# Altium PCB BMS_main.PcbDoc
Units mm, origin at the board's own origin, x right, y up, seen from the top; angles counter-clockwise.
Board outline 93 x 63 mm, 2 copper layers (Top Layer, Bottom Layer), stack 2.071 mm thick; 128 components, 116 nets, 463 pads, 112 vias.
Unrouted connection lines stored in the file: 30.
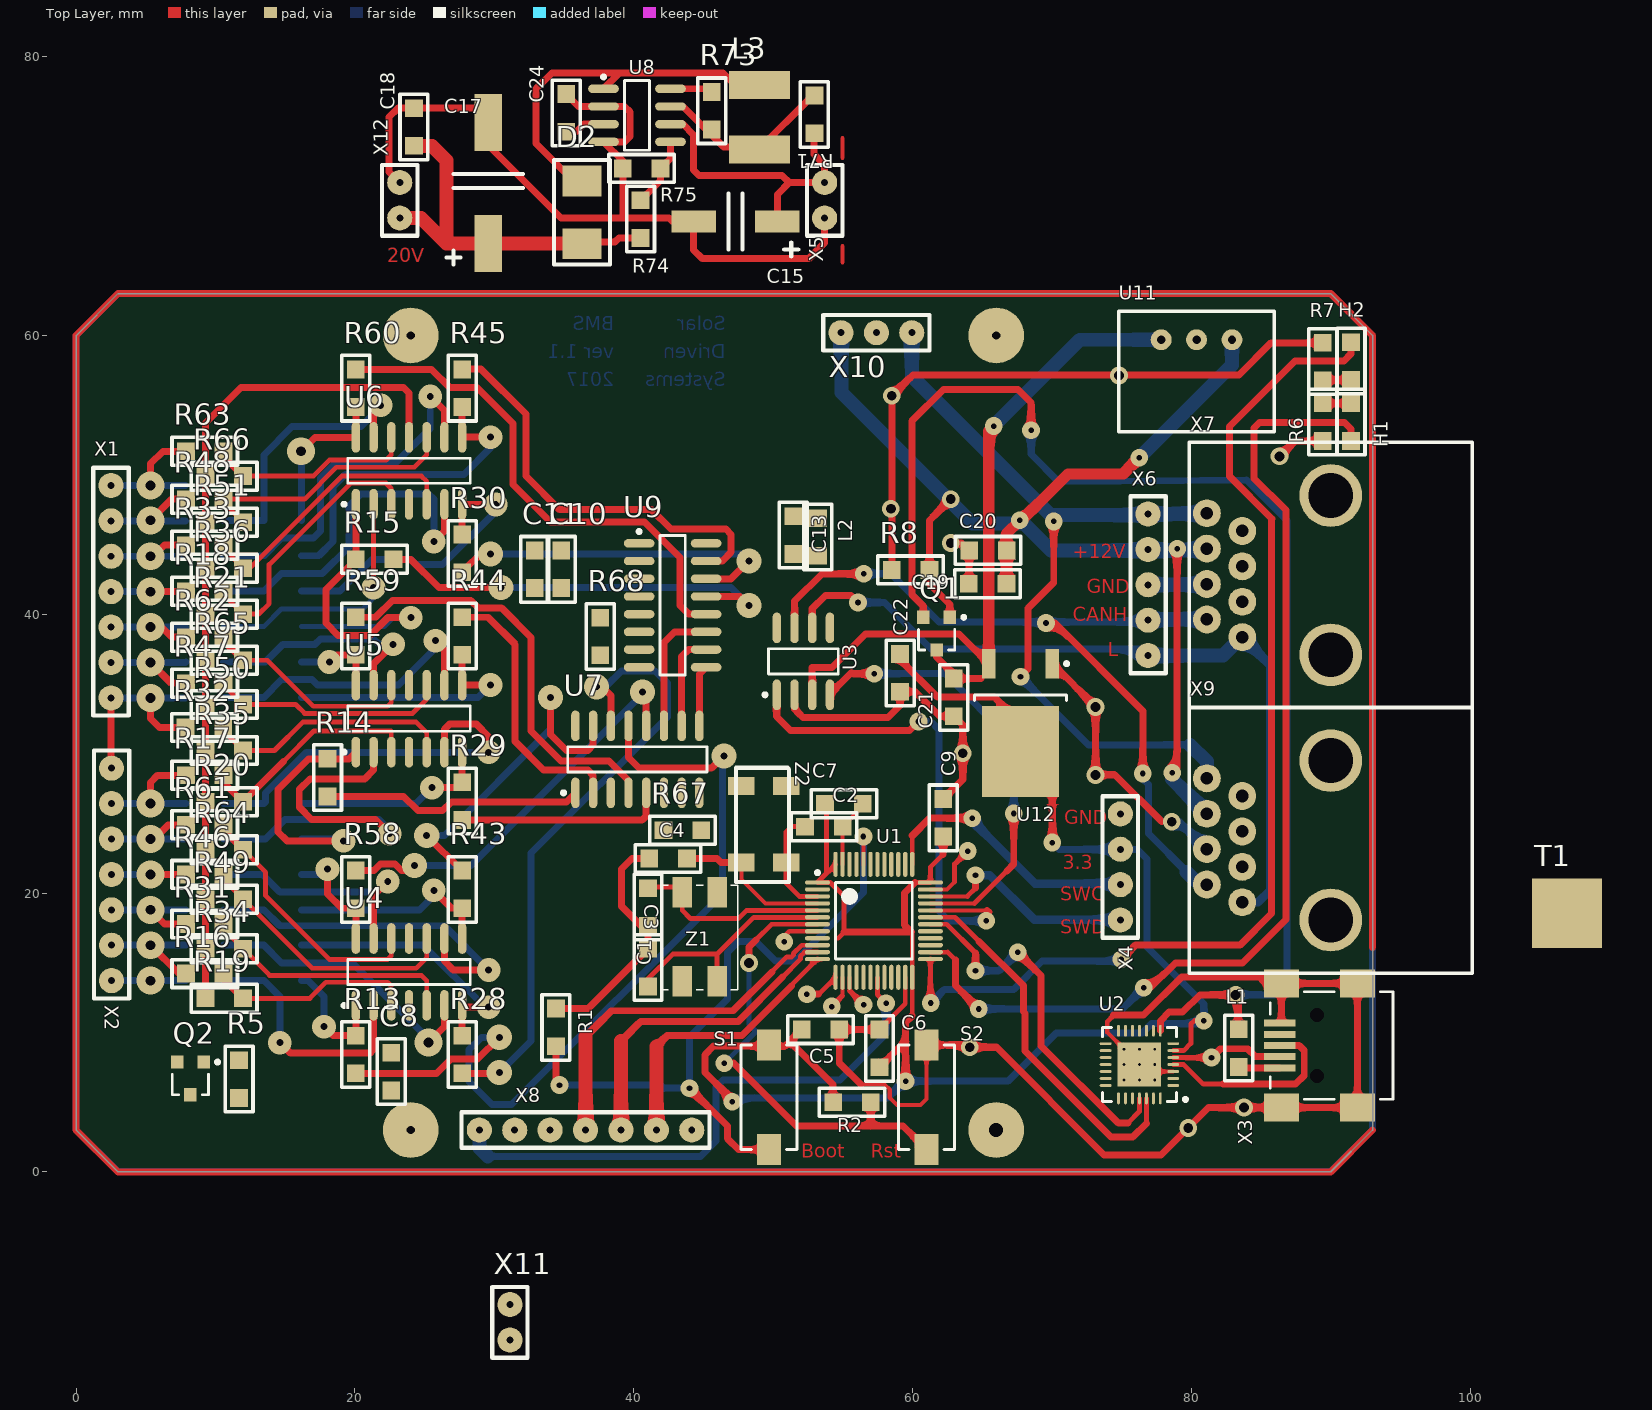
[diagram p0: Top Layer view]
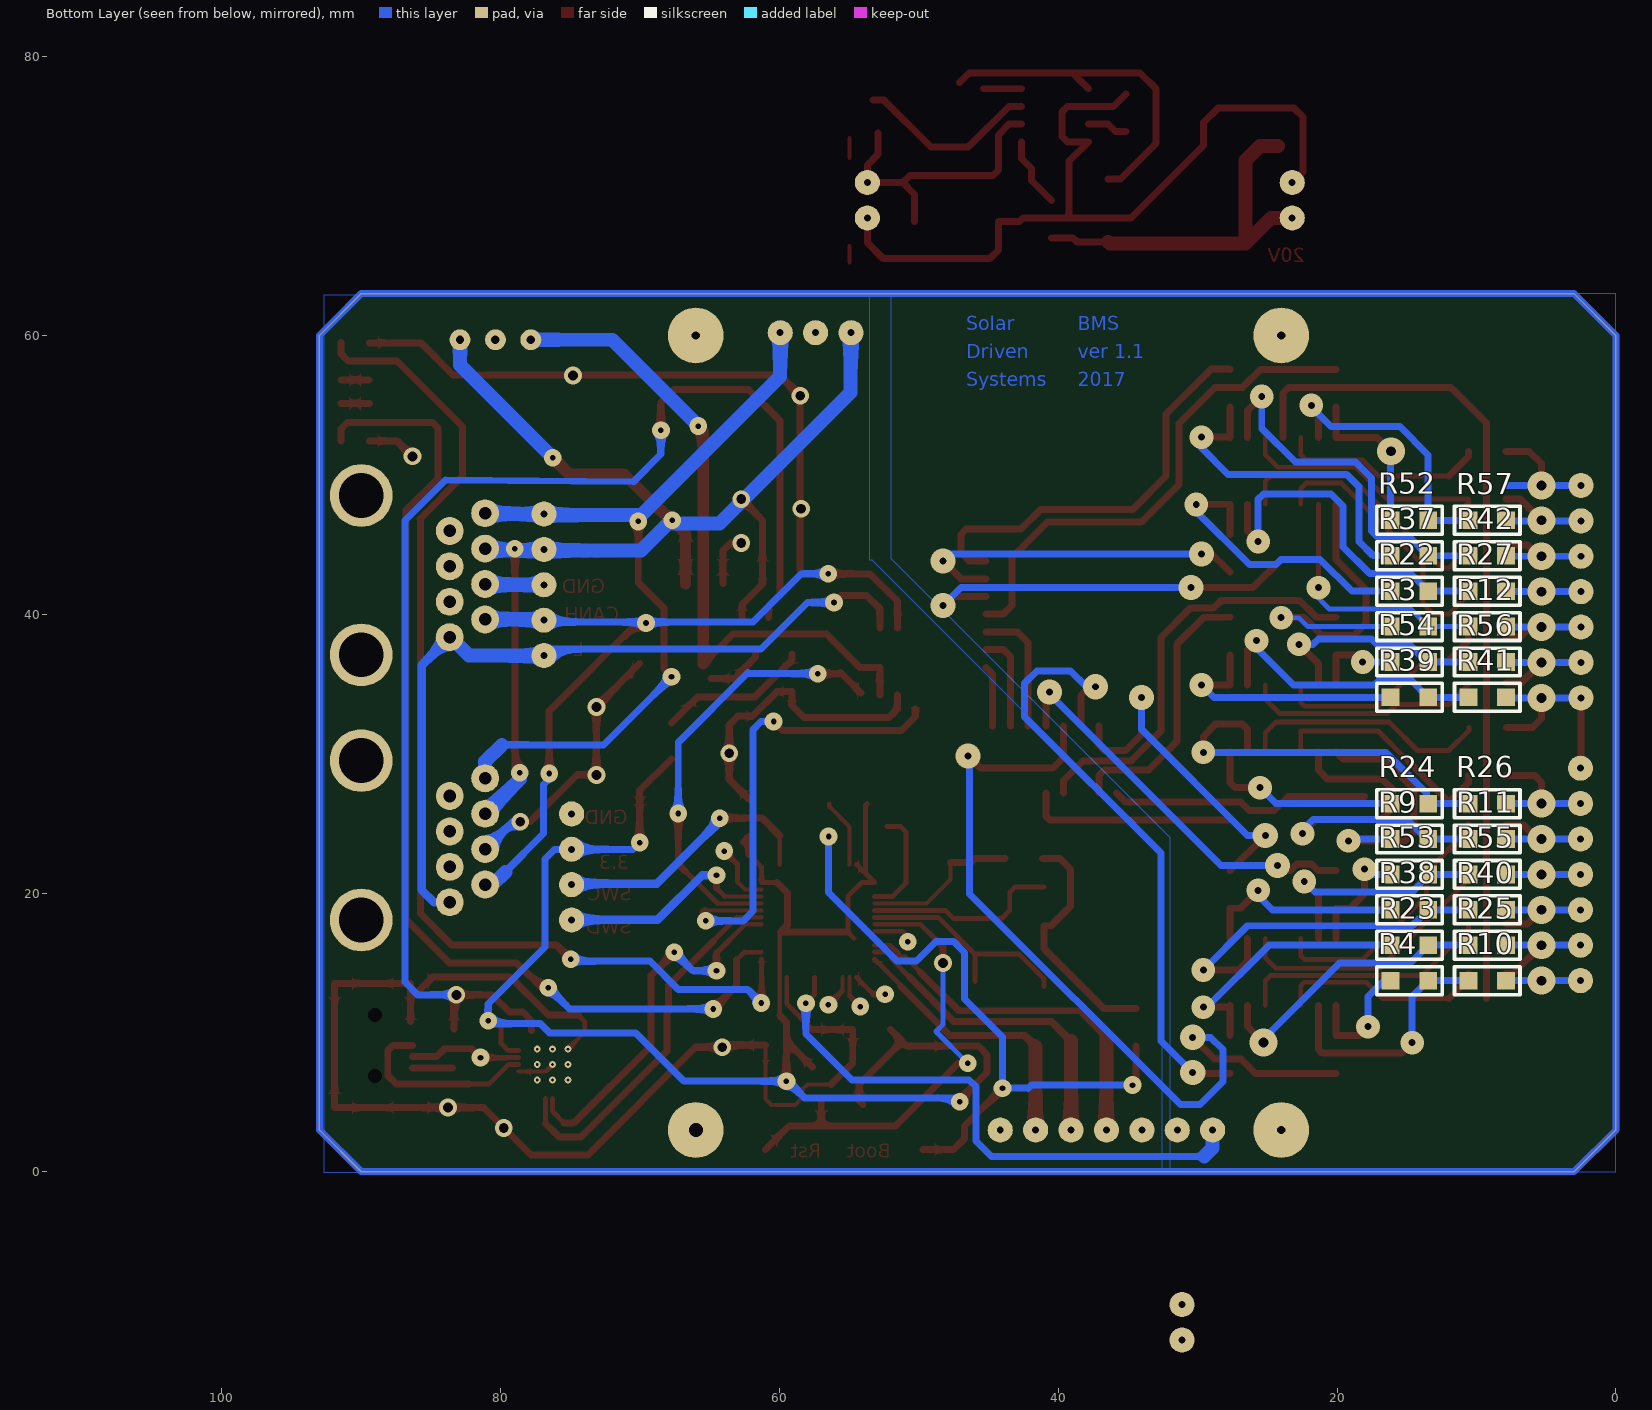
[diagram p1: Bottom Layer view, seen from below]

## Layer stack, top to bottom
Top Solder: solder mask 0.0102, Solder Resist, Dk 3.5
Top Layer: signal copper 0.0356
Dielectric 1: dielectric 2, FR-4, Dk 4.8
Bottom Layer: signal copper 0.0356
Bottom Solder: solder mask 0.0102, Solder Resist, Dk 3.5

## Board outline
0,3 0,60 3,63 90,63 93,60 93,3 90,0 3,0

## Design rules (kind name [scope] priority, off if disabled: settings)
Clearance Power-_poly [InNet('-_CELL_1') vs InPoly] p1: gap=0.5
Clearance Power+_poly [InNet('+_CELL_12') vs InPoly] p2: gap=0.5
Clearance Poly-all [All vs InPoly] p3: gap=0.4
Clearance Clearance_1 [All] p4: gap=0.15
PolygonConnect PolygonConnect_to_tie [All vs HasFootprint('Poly_tie_5x5')] p1: connectstyle=Direct reliefconductorwidth=0.5 reliefentries=4 polygonreliefangle="90 Angle" airgapwidth=0.35
PolygonConnect PolygonConnect_1 [All] p2: connectstyle=Relief reliefconductorwidth=0.4 reliefentries=4 polygonreliefangle="90 Angle" airgapwidth=0.4
RoutingVias [All] p1: holewidth=0.711 width=1.27 viastyle="Through Hole" minholewidth=0.711 minwidth=1.27 maxholewidth=0.711 maxwidth=1.27
ShortCircuit [InNet('GND') vs InNet('GNDA')] p1: allowed=TRUE
SolderMaskExpansion [All] p1: expansion=0.102
Width [All] p1: maxlimit=2 minlimit=0.254 preferedwidth=0.35
29 further rules are at their usual default settings.

## Components (designator, comment, footprint, x,y, rotation, side; value= is the part's Value field where it differs from the comment)
C1 "22pF" C0805 41.021,17.653 r90 top
C2 "10pF" C0805 54.991,24.765 r180 top
C3 "22pF" C0805 41.021,16.002 r270 top
C4 "10pF" C0805 41.115,22.479 r0 top
C5 "100nF" C0805 54.74,10.207 r180 top
C6 "100nF" C0805 57.628,10.207 r270 top
C7 "100nF" C0805 56.421,26.416 r180 top
C8 "100nF" C0805 22.606,8.542 r270 top
C9 "100nF" C0805 62.2,26.75 r270 top
C10 "100nF" C0805 34.798,41.877 r90 top
C11 "100nF" C0805 32.893,41.877 r90 top
C13 "100nF" C0805 51.435,44.323 r90 top
C15 "100uF" CAP_EL_SMD_6.3mm 50.296,68.172 r180 top
C17 "470uF" Cap_El_SMD_10mm 29.564,66.584 r90 top
C18 "0.1uF" C0805 24.23,76.3 r270 top
C19 "100nF" C0805 64.033,42.185 r0 top
C20 "100nF" C0805 64.059,44.577 r0 top
C21 "100nF" C0805 62.962,32.686 r90 top
C22 "100nF" C0805 59.106,34.442 r90 top
C24 "722pF" C0805 35.152,77.316 r270 top
D2 "S2M" SMB_DIODE 36.286,71.084 r270 top
H1 "LED_SMD" C0805 91.456,52.432 r90 top
H2 "LED_SMD" C0805 91.456,59.507 r270 top
L1 "Inductance" L0805 83.399,7.528 r90 top
L2 "BLM" L0805 53.213,44.196 r90 top
L3 "470uH" L1812 49.022,73.078 r90 top
Q1 "IRLML6401" sot-23 61.722,38.608 r180 top
Q2 "IRLML6401" sot-23 8.189,6.699 r180 top
R1 "Resistor" R0805 34.417,11.717 r270 top
R2 "Resistor" R0805 54.3,5 r0 top
R3 "249K" R0805 13.462,39.116 r0 bottom
R4 "249K" R0805 13.462,13.716 r0 bottom
R5 "10K" R0805 11.684,5.301 r90 top
R6 "Resistor" R0805 89.424,55.132 r270 top
R7 "Resistor" R0805 89.424,59.474 r270 top
R8 "10K" R0805 58.514,43.18 r0 top
R9 "249K" R0805 13.462,23.876 r0 bottom
R10 "499K" R0805 7.874,13.716 r0 bottom
R11 "499K" R0805 7.874,23.876 r0 bottom
R12 "499K" R0805 7.874,39.116 r0 bottom
R13 "10K" R0805 20.066,9.766 r270 top
R14 "10K" R0805 18.034,29.624 r270 top
R15 "10K" R0805 20.066,43.942 r0 top
R16 "499K" R0805 7.874,14.224 r0 top
R17 "499K" R0805 7.874,28.448 r0 top
R18 "499K" R0805 7.874,41.656 r0 top
R19 "249K" R0805 9.271,12.446 r0 top
R20 "249K" R0805 9.271,26.543 r0 top
R21 "249K" R0805 9.271,40.005 r0 top
R22 "249K" R0805 13.462,41.656 r0 bottom
R23 "249K" R0805 13.462,16.256 r0 bottom
R24 "249K" R0805 13.462,26.416 r0 bottom
R25 "499K" R0805 7.874,16.256 r0 bottom
R26 "499K" R0805 7.874,26.416 r0 bottom
R27 "499K" R0805 7.874,41.656 r0 bottom
R28 "10K" R0805 27.686,9.766 r270 top
R29 "10K" R0805 27.686,27.94 r270 top
R30 "10K" R0805 27.686,45.72 r270 top
R31 "499K" R0805 7.874,17.78 r0 top
R32 "499K" R0805 7.841,31.877 r0 top
R33 "499K" R0805 7.874,44.958 r0 top
R34 "249K" R0805 9.271,16.002 r0 top
R35 "249K" R0805 9.271,30.226 r0 top
R36 "249K" R0805 9.271,43.307 r0 top
R37 "249K" R0805 13.462,44.196 r0 bottom
R38 "249K" R0805 13.462,18.796 r0 bottom
R39 "249K" R0805 13.462,34.036 r0 bottom
R40 "499K" R0805 7.874,18.796 r0 bottom
R41 "499K" R0805 7.874,34.036 r0 bottom
R42 "499K" R0805 7.874,44.196 r0 bottom
R43 "10K" R0805 27.686,18.91 r90 top
R44 "10K" R0805 27.686,37.084 r90 top
R45 "10K" R0805 27.686,54.864 r90 top
R46 "499K" R0805 7.874,21.336 r0 top
R47 "499K" R0805 7.874,35.052 r0 top
R48 "499K" R0805 7.874,48.26 r0 top
R49 "249K" R0805 9.271,19.558 r0 top
R50 "249K" R0805 9.271,33.528 r0 top
R51 "249K" R0805 9.271,46.593 r0 top
R52 "249K" R0805 13.462,46.736 r0 bottom
R53 "249K" R0805 13.462,21.336 r0 bottom
R54 "249K" R0805 13.462,36.576 r0 bottom
R55 "499K" R0805 7.874,21.336 r0 bottom
R56 "499K" R0805 7.874,36.576 r0 bottom
R57 "499K" R0805 7.874,46.736 r0 bottom
R58 "10K" R0805 20.066,18.91 r90 top
R59 "10K" R0805 20.066,37.084 r90 top
R60 "10K" R0805 20.066,54.864 r90 top
R61 "499K" R0805 7.874,24.892 r0 top
R62 "499K" R0805 7.874,38.354 r0 top
R63 "499K" R0805 7.874,51.689 r0 top
R64 "249K" R0805 9.271,23.114 r0 top
R65 "249K" R0805 9.271,36.703 r0 top
R66 "249K" R0805 9.271,49.911 r0 top
R67 "10K" R0805 42.131,24.511 r0 top
R68 "10K" R0805 37.592,39.751 r270 top
R71 "1.5" R0805 52.959,74.516 r90 top
R73 "180" R0805 45.593,77.47 r270 top
R74 "15K" R0805 40.486,69.696 r270 top
R75 "1K" R0805 39.216,71.982 r0 top
S1 "Tact_switch" Tact_switch_smd 49.7,9.1 r270 top
S2 "Tact_switch" Tact_switch_smd 61,9.1 r270 top
T1 "Poly_tie" Poly_tie_5x5 105.95,18.542 r0 top
U1 "STM32F103C8T6" LQFP48_N 57.226,18.009 r0 top
U2 "CP2102-GM" SLAB-QFN-28-3125x3125TP_N 76.275,7.696 r180 top
U3 "MCP2551-I/SN" SOIC-SN8_N 52.167,36.623 r90 top
U4 "LM324AD" SO14_N 23.876,14.338 r90 top
U5 "LM324AD" SO14_N 23.876,32.512 r90 top
U6 "LM324AD" SO14_N 23.876,50.292 r90 top
U7 "M74HC4051M1R" SO16_N 40.259,29.591 r90 top
U8 "MC33063AD" 751-05_N 40.232,75.792 r0 top
U9 "M74HC4051M1R" SO16_N 42.786,40.64 r0 top
U11 "DC/DC 5v" "DC/DC R-78E" 82.915,59.693 r180 top
U12 "LD1117ADT12TR" TO-252_N 67.745,32.204 r270 top
X1 "PINS 7x2.54" "PINS 7X2.54" 2.5,49.24 r270 top
X2 "PINS 7x2.54" "PINS 7X2.54" 2.54,28.956 r270 top
X3 "miniUSB" miniUSB 92.107,9.064 r90 top
X4 "Pins 4x2.54" "Pins 4x2.54" 74.905,18.059 r90 top
X5 "Pins 2x2.54" "Pins 2x2.54" 53.694,68.426 r90 top
X6 "Pins 5x2.54" "Pins 5x2.54" 76.897,37.033 r90 top
X7 "RJ45" RJ45 83.653,38.357 r90 top
X8 "PINS 7x2.54" "PINS 7X2.54" 28.92,3 r0 top
X9 "RJ45" RJ45 83.65,19.34 r90 top
X10 "Pins 3x2.54" "Pins 3x2.54" 54.864,60.198 r0 top
X11 "Pins 2x2.54" "Pins 2x2.54" 31.115,-12.065 r90 top
X12 "Pins 2x2.54" "Pins 2x2.54" 23.214,70.966 r270 top
Z1 "12 MHz" "kx 13 12MHz" 45.974,20.066 r270 top
Z2 "32.768kHz" "Geyer KX - 327S 32.768kHz" 50.927,22.186 r90 top

## Footprints (in the part's own frame and the unit in brackets; to place one, negate y for a bottom-side part, rotate by r counter-clockwise, add the part's x,y. Pads: shape width x height; smd on the part's side, far side on the other; paste and mask are expansions set on the pad)
751-05_N [mm] "SOIC, 8-Leads, Body 4.9x3.9mm, Pitch 1.27mm, IPC Medium Density"
  oval 2.2x0.6 smd: 1(-2.4,1.905) 2(-2.4,0.635) 3(-2.4,-0.635) 4(-2.4,-1.905) 5(2.4,-1.905) 6(2.4,-0.635) 7(2.4,0.635) 8(2.4,1.905)
  silkscreen extent -2.52,-2.5 0.9,2.88, body extent -1.95,-2.45 1.95,2.45, height 1.75
C0805 [mm]
  rect 1.27x1.27 smd: 1(0,0) 2(2.7,0)
  silkscreen extent -1,-1 3.7,1, body extent 0.32,-0.66 2.42,0.64, height 0.51
CAP_EL_SMD_6.3mm [mm]
  rect 3.2x1.6 smd: 1(0,0) 2(6,0)
  silkscreen extent -1.5,-2 3.5,2.5, body extent -0.65,-3.3 6.65,3.3, height 5.9
Cap_El_SMD_10mm [mm]
  rect 4.1x2 smd: 1(0,0) 2(8.7,0)
  silkscreen extent -1.5,-2.5 5,3, body extent -0.55,-4.25 9.15,4.25, height 10.3
"DC/DC R-78E" [mm]
  round 1.5 hole 0.6: 1(0,0) 2(2.54,0) 3(5.08,0)
  silkscreen extent -3.05,-2.03 8.13,6.6, body extent -3.16,-2.13 8.34,5.42, height 3.18
"Geyer KX - 327S 32.768kHz" [mm]
  rect 1.3x1.9 smd: 1(0,0) 2(0,3.2) 3(5.5,3.2) 4(5.5,0)
  silkscreen extent -1.4,-0.2 6.8,3.6, body extent -1.6,-0.25 7.1,3.55, height 2.51
"kx 13 12MHz" [mm]
  rect 2.2x1.4 smd: 1(0,-2.5) 2(6.4,-2.5) 3(6.4,0) 4(0,0)
  silkscreen extent -0.5,-4 7,1.5, body extent -0.27,-3.77 6.73,1.23
L0805 [mm]
  rect 1.27x1.27 smd: 1(0,0) 2(2.7,0)
  silkscreen extent -1,-1 3.7,1, body extent 0.32,-0.6 2.32,0.6
L1812 [mm]
  rect 2x4.4 smd: 1(0.25,0) 2(4.9,0)
  body extent 0.25,-1.6 4.75,1.6, height 3.2
LQFP48_N [mm] "Thin QFP, 48-Leads, Body 7x7mm, Pitch 0.5mm, IPC Medium Density"
  oval 1.8x0.3 smd: 1(-4.05,2.75) 2(-4.05,2.25) 3(-4.05,1.75) 4(-4.05,1.25) 5(-4.05,0.75) 6(-4.05,0.25) 7(-4.05,-0.25) 8(-4.05,-0.75) 9(-4.05,-1.25) 10(-4.05,-1.75) 11(-4.05,-2.25) 12(-4.05,-2.75) 25(4.05,-2.75) 26(4.05,-2.25) 27(4.05,-1.75) 28(4.05,-1.25) 29(4.05,-0.75) 30(4.05,-0.25) 31(4.05,0.25) 32(4.05,0.75) 33(4.05,1.25) 34(4.05,1.75) 35(4.05,2.25) 36(4.05,2.75)
  oval 0.3x1.8 smd: 13(-2.75,-4.05) 14(-2.25,-4.05) 15(-1.75,-4.05) 16(-1.25,-4.05) 17(-0.75,-4.05) 18(-0.25,-4.05) 19(0.25,-4.05) 20(0.75,-4.05) 21(1.25,-4.05) 22(1.75,-4.05) 23(2.25,-4.05) 24(2.75,-4.05) 37(2.75,4.05) 38(2.25,4.05) 39(1.75,4.05) 40(1.25,4.05) 41(0.75,4.05) 42(0.25,4.05) 43(-0.25,4.05) 44(-0.75,4.05) 45(-1.25,4.05) 46(-1.75,4.05) 47(-2.25,4.05) 48(-2.75,4.05)
  silkscreen extent -4.17,-2.75 2.75,3.57, body extent -3.5,-3.5 3.5,3.5, height 1.6
miniUSB [mm]
  rect 0.5x2.25 smd: 1(-1.6,5.775) 2(-0.8,5.775) 3(0,5.775) 4(0.8,5.775) 5(1.6,5.775)
  rect 2x2.5 smd: 6(-4.45,5.65) 7(4.45,5.65) 8(-4.45,0.2) 9(4.45,0.2)
  rect 0x0 hole 1 unplated: ""(-2.2,3.1) ""(2.2,3.1)
  silkscreen extent -3.85,-2.35 3.85,6.45, body extent -5,-2.45 5,6.45, height 3.95
"Pins 2x2.54" [mm]
  round 1.8 hole 0.5: 1(0,0) 2(2.54,0)
  silkscreen extent -1.27,-1.27 3.81,1.27, body extent -1.27,-1.27 3.81,1.27, height 8.81
"Pins 3x2.54" [mm]
  round 1.8 hole 0.5: 1(0,0) 2(2.54,0) 3(5.08,0)
  silkscreen extent -1.27,-1.27 6.35,1.27, body extent -1.27,-1.27 6.35,1.27, height 8.81
"Pins 4x2.54" [mm]
  round 1.8 hole 0.5: 1(0,0) 2(2.54,0) 3(5.08,0) 4(7.62,0)
  silkscreen extent -1.27,-1.27 8.89,1.27, body extent -1.27,-1.27 8.89,1.27, height 8.81
"Pins 5x2.54" [mm]
  round 1.8 hole 0.5: 1(0,0) 2(2.54,0) 3(5.08,0) 4(7.62,0) 5(10.16,0)
  silkscreen extent -1.27,-1.27 11.43,1.27, body extent -1.27,-1.27 11.43,1.27, height 8.81
"PINS 7X2.54" [mm]
  round 1.8 hole 0.5: 1(0,0) 2(2.54,0) 3(5.08,0) 4(7.62,0) 5(10.16,0) 6(12.7,0) 7(15.24,0)
  silkscreen extent -1.27,-1.27 16.51,1.27, body extent -1.27,-1.27 16.51,1.27, height 8.54
Poly_tie_5x5 [mm]
  rect 3x5 smd: 1(0,0) 2(2,0)
R0805 [mm]
  rect 1.27x1.27 smd: 1(0,0) 2(2.7,0)
  silkscreen extent -1,-1 3.7,1, body extent 0.35,-0.62 2.35,0.63, height 0.61
RJ45 [mm]
  round 2 hole 0.9: 1(0,0) 2(1.27,2.54) 3(2.54,0) 4(3.81,2.54) 5(5.08,0) 6(6.35,2.54) 7(7.62,0) 8(8.89,2.54)
  round 4.5 hole 3.21: 9(-1.27,-6.35) 10(10.16,-6.35)
  silkscreen extent -5.08,-16.51 13.97,3.81, body extent -3.18,-14.48 12.06,3.81, height 12.7
SLAB-QFN-28-3125x3125TP_N [mm] "QFN, 28-Leads, Body 5x5mm, Pitch 0.5mm, Thermal Pad 3.13x3.13mm, IPC Medium Density"
  oval 0.85x0.2 smd: 1(-2.425,1.5) 2(-2.425,1) 3(-2.425,0.5) 4(-2.425,0) 5(-2.425,-0.5) 6(-2.425,-1) 7(-2.425,-1.5) 15(2.425,-1.5) 16(2.425,-1) 17(2.425,-0.5) 18(2.425,0) 19(2.425,0.5) 20(2.425,1) 21(2.425,1.5)
  oval 0.2x0.85 smd: 8(-1.5,-2.425) 9(-1,-2.425) 10(-0.5,-2.425) 11(0,-2.425) 12(0.5,-2.425) 13(1,-2.425) 14(1.5,-2.425) 22(1.5,2.425) 23(1,2.425) 24(0.5,2.425) 25(0,2.425) 26(-0.5,2.425) 27(-1,2.425) 28(-1.5,2.425)
  rect 3.13x3.13 smd: 29(0,0)
  silkscreen extent -3.42,-2.65 2.65,2.65, body extent -2.5,-2.5 2.5,2.5, height 1
SMB_DIODE [mm]
  rect 2.2x2.8 smd: 1(0,0) 2(4.5,0)
  silkscreen extent -1.5,-2 6,2, body extent -0.55,-1.95 4.95,1.95, height 2.45
SO14_N [mm] "SOIC, 14-Leads, Body 8.7x3.9mm, Pitch 1.27mm, IPC Medium Density"
  oval 2.2x0.6 smd: 1(-2.4,3.81) 2(-2.4,2.54) 3(-2.4,1.27) 4(-2.4,0) 5(-2.4,-1.27) 6(-2.4,-2.54) 7(-2.4,-3.81) 8(2.4,-3.81) 9(2.4,-2.54) 10(2.4,-1.27) 11(2.4,0) 12(2.4,1.27) 13(2.4,2.54) 14(2.4,3.81)
  silkscreen extent -2.52,-4.4 0.9,4.78, body extent -1.95,-4.33 1.95,4.33, height 1.75
SO16_N [mm] "SOIC, 16-Leads, Body 9.9x3.9mm, Pitch 1.27mm, IPC Medium Density"
  oval 2.2x0.6 smd: 1(-2.4,4.445) 2(-2.4,3.175) 3(-2.4,1.905) 4(-2.4,0.635) 5(-2.4,-0.635) 6(-2.4,-1.905) 7(-2.4,-3.175) 8(-2.4,-4.445) 9(2.4,-4.445) 10(2.4,-3.175) 11(2.4,-1.905) 12(2.4,-0.635) 13(2.4,0.635) 14(2.4,1.905) 15(2.4,3.175) 16(2.4,4.445)
  silkscreen extent -2.52,-5 0.9,5.42, body extent -1.95,-4.95 1.95,4.95, height 1.75
SOIC-SN8_N [mm] "SOIC, 8-Leads, Body 4.9x3.8mm, Pitch 1.27mm, IPC Medium Density"
  oval 2.2x0.6 smd: 1(-2.4,1.905) 2(-2.4,0.635) 3(-2.4,-0.635) 4(-2.4,-1.905) 5(2.4,-1.905) 6(2.4,-0.635) 7(2.4,0.635) 8(2.4,1.905)
  silkscreen extent -2.52,-2.5 0.9,2.88, body extent -2,-2.5 2,2.5, height 1.75
sot-23 [mm] "SOT-23; 3 Leads; Body 3.1 x 2.5 mm, inc. leads (LxW max)"
  rect 0.9x0.95 smd: 1(-0.95,-1.175) 2(0.95,-1.175) 3(0,1.175)
  silkscreen extent -2.07,-1.3 1.3,1.18
Tact_switch_smd [mm]
  rect 2.2x1.7 smd: 1(0,0) 2(7.5,0)
  silkscreen extent 0,-2 7.5,2, body extent -0.19,-1.8 7.81,1.8, height 2.51
TO-252_N [mm] "D-PAK, 4-Leads, Body 6.1x6.5mm, Pitch 2.28mm, Lead Span 9.7mm, IPC Medium Density"
  rect 2.1x0.95 smd: 1(-4.25,2.28) 3(-4.25,-2.28)
  rect 6.5x5.5 smd: 4(2.05,0)
  silkscreen extent -4.37,-3.3 -1.6,3.43, body extent -2,-3.3 4.2,3.3, height 2.4

## Part data
C1 C2 C3 C4 C5 C6 C7 C8 C9 C10 C11 C13 C18 C19 C20 C21 C22 C24: library part Condensator
C15 C17: library part Cond_polar
D2: library part Diod
L2 L3: library part Inductance
R3 R4 R5 R8 R9 R10 R11 R12 R13 R14 R15 R16 R17 R18 R19 R20 R21 R22 R23 R24 R25 R26 R27 R28 R29 R30 R31 R32 R33 R34 R35 R36 R37 R38 R39 R40 R41 R42 R43 R44 R45 R46 R47 R48 R49 R50 R51 R52 R53 R54 R55 R56 R57 R58 R59 R60 R61 R62 R63 R64 R65 R66 R67 R68 R71 R73 R74 R75: library part Resistor
U1: "STM32 ARM-based 32-bit MCU with 64 Kbytes Flash, 48-pin LQFP, Industrial Temperature"
U2: "Single-Chip USB to UART Bridge, 1024 Bytes EEPROM, -40 to 85 degC, 28-pin QFN, Tube"
U3: "High-Speed CAN Transceiver, 8-Pin SOIC, Industrial Temperature"
U4 U5 U6: "Low-Power Quad Operational Amplifier"
U7 U9: "Analog Multiplexer/Demultiplexer Single 8-Channel"
U8: "DC-to-DC Converter Control Circuit"
U11: library part "DC/DC R-78E"
U12: "1A, Low Drop Positive Voltage Regulator, 1.2V, 3-Pin DPAK, Tape and Reel"
Z1: library part "KX 13 Geyer"
Z2: library part "Crystal Oscillator"

## Free pads (board coordinates)
  round 4 hole 0.6: 1(24,3) 2(24,60) 3(66,60)
  round 4 hole 1: 4(66,3)

## Via types
v1: diameter 1.27, hole 0.4, Top Layer to Bottom Layer, 39 vias
v2: diameter 1.7, hole 0.5, Top Layer to Bottom Layer, 22 vias
v3: diameter 2, hole 0.7, Top Layer to Bottom Layer, 15 vias
v4: diameter 1.8, hole 0.5, Top Layer to Bottom Layer, 12 vias
v5: diameter 1.27, hole 0.7, Top Layer to Bottom Layer, 11 vias
v6: diameter 0.5, hole 0.2, Top Layer to Bottom Layer, 9 vias
v7: diameter 1.27, hole 0.711, Top Layer to Bottom Layer, 4 vias

## Nets (pads, with @x,y where several pads share a name; then routed paths per layer and width w, separated by ;. In a path a pad name is that pad's centre, name@x,y a point inside that pad or via, vN(x,y) a via of type N, cw(c..) or ccw(c..) an arc to the next point about the centre after c; other vN are vias at no path point)
+3.3V: C5.2 C6.2 C7.2 C9.2 C22.2 L2.1 R2.1 R67.2 R68.2 S1.1 U1.1 U1.24 U1.36 U1.48 U2.6 U7.16 U9.16 U12.4 X4.3 | length 136.4
  Top Layer w0.35: C7.2 53.826,26.311 53.826,21.409 ; U1.48 53.826,21.409 ; 54.655,16.759 55.088,17.192 55.088,19.769 54.098,20.759 U1.1 53.826,21.409 ; 59.976,11.2 U1.24 59.976,17.258 ; 60.179,20.759 U1.36 61.276,21.856 62.2,22.78 ; U2.6 79.454,8.696 79.97,9.212 79.97,10.609 80.207,10.846 v1(80.899,10.846)
  Top Layer w0.5: v1(47.055,5.031) 47.208,5.031 45.1,7.139 45.1,8.397 45.72,9.017 50.85,9.017 51.193,9.36 ; C5.2 51.193,9.36 ; R2.1@54,4.834 54.28,5.114 54.28,6.274 51.193,9.36 ; 55.088,17.192 59.91,17.192 59.411,17.692 59.411,19.991 60.179,20.759 ; C6.2 59.5,9.379 ; C22.2 59.106,36.728 61.773,34.061 65.888,34.061 U12.4@67.745,32.204 ; v1(59.5,6.5) 59.5,9.379 ; 59.976,11.2 59.5,10.724 59.5,9.379 ; 62.2,22.78 C9.2 C9.2@62.581,23.669 ; U12.4@67.745,29.629 70.028,27.346 v1(70.028,23.622)
  Bottom Layer w0.5: v1(47.055,5.031) 47.439,5.031 47.247,5.223 47.333,5.309 58.191,5.309 v1@59.441,6.559 ; v1(59.5,6.5) 66.85,6.5 70.307,9.957 76.479,9.957 77.157,10.634 v1@80.571,10.634 ; v1(70.028,23.622) 70.52,23.13 76.133,23.13 76.81,22.454 76.81,16.123 80.899,12.034 v1@80.899,11.256
+5V: C15.1 C21.2 Q1.3 R71.1 U3.3 U8.6 U11.3 U12.3 X5.2 | length 73.8
  Top Layer w0.5: U8.6 43.534,75.157 44.296,74.395 44.296,71.855 44.677,71.474 50.646,71.474 51.154,70.966 ; C15.1 50.296,70.108 51.154,70.966 ; U3.3 52.802,36.173 54.207,36.173 56.624,38.59 63.329,38.59 U12.3 ; R71.1@52.932,74.522 52.932,72.998 53.694,72.236 X5.2 51.154,70.966 ; Q1.3 61.722,36.925 C21.2@62.962,35.685 ; C21.2 64.922,35.386
  Top Layer w0.8: U12.3 65.465,53.146 v1(65.819,53.5)
  Bottom Layer w1: v1(65.819,53.5) 72.012,59.693 U11.3
+5VUSB: L1.2 Q1.2 U2.8 | length 95
  Top Layer w0.5: Q1.2 60.772,40.574 59.944,41.402 59.944,53.848 62.23,56.134 67.564,56.134 68.5,55.198 v1(68.5,53.2) ; U2.8 77.775,10.83 78.407,11.462 79.375,11.462 80.613,12.7 v7(83.181,12.7) 83.348,12.534 L1.2@83.348,10.228
  Bottom Layer w0.5: v1(68.5,53.2) 68.5,51.49 70.484,49.505 83.97,49.63 86.87,46.73 86.87,13.623 85.947,12.7 v7(83.181,12.7)
+12V: C19.2 C20.2 Q1.1 Q2.1 R5.2 R8.2 U11.1 X6.4 X7.6 X9.6 X10.1 | length 92.1
  Top Layer w0.5: Q1.1 62.672,40.706 61.214,42.164 R8.2 61.214,46.736 v7(62.738,48.26) ; v1(67.691,46.736) v1@67.818,46.736 ; v1(78.624,28.629) 78.979,28.984 v1(78.979,44.707)
  Top Layer w0.8: C19.2 66.733,45.778 v1(67.691,46.736) ; v1@67.818,46.736 71.155,50.073 75.113,50.073 v1(76.27,51.23)
  Bottom Layer w0.5: v1(67.691,46.736) 67.767,46.736 v1@68.003,46.5 ; v1@78.624,28.176 v1(78.624,28.629)
  Bottom Layer w1: X10.1@54.9,60.198 54.9,55.9 64.3,46.5 68.003,46.5 69.926,44.577 X7.6@81.113,44.577 ; v1(76.27,51.23) 82.915,57.875 U11.1 ; v1@78.624,28.176 X9.6
+20V: C8.1 C10.1 C11.1 C17.1 C18.2 D2.2 R74.2 U4.4 U5.4 U6.4 X12.2 | length 27
  Top Layer w0.5: D2.2@36.422,66.72 38.653,66.72 38.929,66.996 R74.2
  Top Layer w1: X12.2 24.738,68.426 26.58,66.584 ; C18.2 25.533,73.6 26.58,72.553 26.58,66.584 ; D2.2@36.422,66.72 D2.2 C17.1 26.58,66.584
+_CELL_12: X8.3 X11.1
-12V: X6.5 X7.8 X9.8 X10.3 | length 58.8
  Top Layer w0.5: v1(67.742,35.509) 68.294,36.062 68.294,40.431 70.129,42.266 v1(70.129,46.66) ; X6.5@77.26,47.099 X6.5@77.463,47.099
  Bottom Layer w0.5: v1(67.742,35.509) 72.616,30.635 79.919,30.635 ; v1(70.129,46.66) v1@70.533,47.063
  Bottom Layer w1: X10.3 59.944,57.056 69.883,47.117 X6.5@77.343,47.117 ; X6.5 X7.8@81.059,47.193 ; 79.919,30.635 81.11,29.444 X9.8
-_CELL_1: X8.2 X11.2
A: U7.11 U9.11 | length 9.3
  Top Layer w0.5: U7.11 42.164,37.973 42.926,38.735 U9.11
ADC_IN: U1.18 U7.3 U9.3
B: U7.10 U9.10 | length 6.9
  Top Layer w0.5: U7.10 43.434,36.957 43.942,37.465 U9.10
BAL0: R10.1 X2.7 | length 5.3
  Bottom Layer w0.5: X2.7 v3(5.334,13.716) R10.1
BAL1: R16.1 R25.1 X2.6 | length 8.7
  Top Layer w0.5: v3(5.334,16.256) 7.366,14.224 R16.1
  Bottom Layer w0.5: X2.6 v3(5.334,16.256) R25.1
BAL2: R31.1 R40.1 X2.5 | length 8.3
  Top Layer w0.5: v3(5.334,18.796) 6.35,17.78 R31.1
  Bottom Layer w0.5: X2.5 v3(5.334,18.796) R40.1
BAL3: R46.1 R55.1 X2.4 | length 7.9
  Top Layer w0.5: v3(5.334,21.336) R46.1
  Bottom Layer w0.5: X2.4 v3(5.334,21.336) R55.1
BAL4: R11.1 R61.1 X2.3 | length 8.3
  Top Layer w0.5: v3(5.334,23.876) 5.588,23.876 6.604,24.892 R61.1
  Bottom Layer w0.5: X2.3 v3(5.334,23.876) R11.1
BAL5: R17.1 R26.1 X2.2 | length 9.6
  Top Layer w0.5: v3(5.334,26.416) 5.334,27.94 5.842,28.448 R17.1
  Bottom Layer w0.5: X2.2 v3(5.334,26.416) R26.1
BAL6: R32.1 R41.1 X1.7 X2.1 | length 14.6
  Top Layer w0.5: X2.1@2.5,29 X1.7 ; v3(5.334,34) 5.334,32.512 5.969,31.877 R32.1
  Bottom Layer w0.5: X1.7 v3(5.334,34) 7.838,34 R41.1
BAL7: R47.1 R56.1 X1.6 | length 8.5
  Top Layer w0.5: v3(5.334,36.54) 6.822,35.052 R47.1
  Bottom Layer w0.5: X1.6 v3(5.334,36.54) 7.838,36.54 R56.1
BAL8: R12.1 R62.1 X1.5 | length 8.2
  Top Layer w0.5: v3(5.334,39.08) 6.132,39.08 6.858,38.354 R62.1
  Bottom Layer w0.5: X1.5 v3(5.334,39.08) R12.1@7.838,39.08
BAL9: R18.1 R27.1 X1.4 | length 7.9
  Top Layer w0.5: v3(5.334,41.62) 7.838,41.62 R18.1
  Bottom Layer w0.5: X1.4 v3(5.334,41.62) R27.1@7.838,41.62
BAL10: R33.1 R42.1 X1.3 | length 8.2
  Top Layer w0.5: v3(5.334,44.16) 5.552,44.16 6.35,44.958 R33.1
  Bottom Layer w0.5: X1.3 v3(5.334,44.16) R42.1@7.838,44.16
BAL11: R48.1 R57.1 X1.2 | length 8.5
  Top Layer w0.5: v3(5.334,46.736) 6.858,48.26 R48.1
  Bottom Layer w0.5: X1.2 R57.1@7.838,46.7
BAL12: R63.1 X1.1 | length 9.8
  Top Layer w0.5: v3(5.334,49.24) 5.334,50.8 6.223,51.689 R63.1
  Bottom Layer w0.5: X1.1 v3(5.334,49.24) 7.838,49.24
BATT_KEY1: U1.10 X8.4 | length 26.1
  Top Layer w0.35: 49.911,14.351 50.983,15.423 51.325,15.423 51.451,15.549 51.451,15.663 52.047,16.259 U1.10
  Top Layer w0.5: 36.54,9.697 38.4,11.557 47.117,11.557 49.911,14.351
  Top Layer w1: X8.4 36.54,9.697
BATT_KEY2: U1.11 X8.5 | length 23.2
  Top Layer w0.35: 50.673,13.97 51.951,15.248 51.951,15.456 52.254,15.759 U1.11
  Top Layer w0.5: 39.08,9.375 40.5,10.795 47.498,10.795 50.673,13.97
  Top Layer w1: X8.5 39.08,9.375
BOOT: R1.2 S1.2 U1.44 | length 50.4
  Top Layer w0.3: U1.44 v1(56.476,24.059)
  Top Layer w0.35: v1@56.151,24.384 v1(56.476,24.059)
  Top Layer w0.5: R1.2 34.417,6.477 v1(34.671,6.223) ; v1(44,6) 46.725,3.275 46.725,2.375 47.5,1.6 S1.2
  Bottom Layer w0.5: v1(34.671,6.223) 41.91,6.223 42.164,5.969 42.195,6 v1(44,6) 44,9.66 46.736,12.396 46.736,15.748 47.498,16.51 48.768,16.51 50.165,15.113 51.562,15.113 56.476,20.027 v1(56.476,24.059)
C: U7.9 U9.9 | length 4.4
  Top Layer w0.5: U7.9 44.704,35.713 U9.9
CAN_RX: U1.32 U3.1 | length 34.8
  Top Layer w0.3: U1.32 65.34,18.759
  Top Layer w0.5: U3.1@50.262,33.194 50.262,32.618 51.232,31.648 59.765,31.648 v1(60.422,32.305) ; v1(65.278,18.009) 65.278,18.436 65.471,18.629 65.34,18.759
  Bottom Layer w0.5: v1(60.422,32.305) 61.311,32.305 61.9,31.716 61.9,18.704 62.595,18.009 v1(65.278,18.009)
CAN_TX: U1.33 U3.4 | length 31.7
  Top Layer w0.3: U1.33 64.446,19.259
  Top Layer w0.35: 64.446,19.259 66.777,21.59
  Top Layer w0.5: U3.4@54.148,34.337 55.625,35.814 55.701,35.738 v1(57.252,35.738) ; 66.777,21.59 67.259,22.073 v1(67.259,25.705)
  Bottom Layer w0.5: v1(57.252,35.738) 62.171,35.738 62.247,35.814 67.259,30.802 v1(67.259,25.705)
CANH: U3.7 X6.2 X7.2 X9.2 | length 58.6
  Top Layer w0.5: U3.7 51.532,40.94 53.492,42.901 v1(56.49,42.901) ; v1(69.571,39.37) 70.206,39.37 76.515,33.06 v1(76.515,28.578) ; X6.2@76.468,39.573 X6.2 ; X7.2@81.059,39.573 X7.2
  Bottom Layer w0.5: v1(56.49,42.901) 58.445,42.901 61.903,39.443 X6.2@76.951,39.443 ; v1(76.515,28.578) 76.515,28.197 76.911,27.801 76.911,24.271 79.665,21.517 ; X6.2 X6.2@76.951,39.627 ; X9.2@80.572,20.61 X9.2
  Bottom Layer w1: X6.2@76.951,39.627 X7.2 ; 79.665,21.517 X9.2@80.572,20.61
CANL: U3.6 X6.1 X7.1 X9.1 | length 56.2
  Top Layer w0.5: U3.6 52.802,40.407 53.746,41.351 55.575,41.351 v1(56.083,40.843)
  Bottom Layer w0.5: v1(56.083,40.843) 57.988,40.843 61.331,37.5 76.43,37.5 X6.1
  Bottom Layer w0.6: X9.1 84.78,19.34 85.67,20.23 85.67,36.34 X7.1
  Bottom Layer w1: X6.1 82.264,37.033 X7.1@83.57,38.339
EN1: R68.1 U9.6
EN2: R67.1 U7.6
FAN: U1.12 X8.6 | length 20.2
  Top Layer w0.35: 51.308,13.335 51.308,13.391 U1.12
  Top Layer w0.5: 41.62,8.999 42.4,9.779 47.752,9.779 51.308,13.335
  Top Layer w1: X8.6 41.62,8.999
GND: C1.1 C2.1 C3.1 C4.1 C5.1 C6.1 C7.1 C9.1 C15.2 C17.2 C18.1 C19.1 C20.1 C21.1 C22.1 C24.1 Q2.3 R1.1 R5.1 R6.2 R7.1 R8.1 R75.1 S2.1 T1.2 U1.23 U1.35 U1.47 U2.3 U2.29 U3.2 U7.7 U7.8 U8.2 U8.4 U9.7 U9.8 U11.2 U12.1 X3.5 X3.6 X3.7 X3.8 X3.9 X4.4 X5.1 X6.3 X7.4 X8.7 X9.4 X10.2 X12.1 | length 277.5
  Top Layer w0.3: U1.47 54.976,24.75 C2.1 56.421,26.195 C7.1 ; 56.286,6.274 57.988,6.274 58.369,5.893 58.369,5.309 58.877,4.801 60.579,4.801 61,5.222 S2.1 ; 59.476,12.055 U1.23 ; U1.35 62.474,20.259 63.017,20.803 ; 74.429,11.24 73.971,10.783 73.971,9.999 v6(75.175,8.796) ; v6(76.275,7.696) 76.775,7.196 U2.3
  Top Layer w0.35: C6.1 59.476,12.055 ; 63.017,20.803 63.017,22.073 v1(63.957,23.012)
  Top Layer w0.5: X12.1 22.452,71.728 22.452,75.665 23.087,76.3 C18.1 28.548,76.3 C17.2 29.564,73.633 34.771,68.426 39.47,68.426 ; R1.1 36.736,11.717 C3.1 C1.1 40.513,17.653 39.116,19.05 39.116,21.717 39.878,22.479 C4.1 ; C24.1 36.041,76.427 U8.2 39.343,76.427 39.724,76.046 39.724,74.268 39.343,73.887 U8.4 39.216,72.503 R75.1 39.216,68.68 39.47,68.426 ; U3.2 51.532,33.202 52.146,32.588 58.242,32.588 59.106,33.452 C22.1 60.173,34.442 61.929,32.686 C21.1 63.602,32.046 v5(63.602,30.023) 63.602,28.152 C9.1 ; X5.1 53.694,66.648 52.551,65.505 44.931,65.505 44.296,66.14 C15.2 42.772,68.172 42.518,68.426 39.47,68.426 ; 56.286,6.274 54.74,7.82 C5.1 C6.1 ; R8.1 v5(58.514,55.669) 60.02,57.175 83.414,57.175 85.712,59.474 R7.1 ; S2.1 63.95,9.1 v5(64.11,8.941) 66.015,8.941 73.736,1.219 77.826,1.219 81.22,4.614 v5(83.769,4.614) X3.6 X3.8 X3.9 X3.7 X3.5@86.457,10.789 ; v5(62.738,45.11) 63.525,45.11 C20.1 C19.1@64.059,42.21 ; U12.1 v5(73.127,33.352) v5(73.127,28.473) 74.524,28.473 77.876,25.121 ; 74.429,11.24 76.58,11.24 79.31,13.97 84.892,13.97 X3.7@85.815,13.047 ; v7(86.325,51.325) 87.432,52.432 R6.2
  Bottom Layer w0.3: X7.4@81.059,42.113 X7.4
  Bottom Layer w0.5: v5(78.588,25.121) 79.139,25.121 X9.4
  Bottom Layer w1: X6.3 X7.4@81.059,42.113
  other v5: 79.781,3.15 58.445,47.574 74.803,57.125
  other v6: 75.175,6.596 76.275,6.596 77.375,6.596 75.175,7.696 77.375,7.696 76.275,8.796 77.375,8.796
GND_OP: C8.2 C10.2 C11.2 Q2.2 R19.1 R20.1 R21.1 R34.1 R35.1 R36.1 R49.1 R50.1 R51.1 R64.1 R65.1 R66.1 U4.11 U5.11 U6.11 | length 60.2
  Top Layer w0.5: R19.1 R34.1 R49.1 R64.1 R20.1 R35.1 R50.1 R65.1 R21.1 R36.1 R51.1 R66.1@9.271,49.878 ; R66.1 9.271,53.721 11.811,56.261 23.495,56.261 23.876,55.88 U6.11
GNDA: C13.1 T1.1 U1.8 | length 2.9
  Top Layer w0.3: 51.168,17.259 U1.8
  Top Layer w0.35: v1(50.8,16.51) 50.8,16.891 51.168,17.259
MULT0: R13.2 U7.13 | length 60.6
  Top Layer w0.5: R13.2 25.85,7.066 26.885,8.101 28.802,8.101 v4(30.353,9.652) ; U7.13 39.624,29.718 40.386,28.956 45.593,28.956 v4@46.355,29.718
  Bottom Layer w0.5: v4(30.353,9.652) 29.083,9.652 28.194,8.763 28.194,6.477 29.845,4.826 31.242,4.826 46.355,19.939 v4@46.355,29.591
  other v4: 46.482,29.845
MULT1: R28.2 U7.14 | length 45
  Top Layer w0.5: R28.2 30.307,7.066 v4(30.353,7.112) ; v4(37.338,34.798) 37.719,34.798 38.354,34.163 U7.14
  Bottom Layer w0.5: v4(30.353,7.112) 32.639,9.398 32.639,22.86 42.418,32.639 42.418,35.052 41.529,35.941 39.116,35.941 37.973,34.798 v4(37.338,34.798)
MULT2: R43.2 U7.15 | length 25.6
  Top Layer w0.5: v4(25.146,24.13) 27.666,21.61 R43.2 ; v4(34.036,34.036) 34.036,31.369 35.179,30.226 36.703,30.226 37.084,30.607 U7.15
  Bottom Layer w0.5: v4(25.146,24.13) 26.416,24.13 34.036,31.75 v4(34.036,34.036)
MULT3: R58.2 U7.12 | length 29.3
  Top Layer w0.5: R58.2 21.366,21.61 21.834,22.078 22.87,22.078 23.338,21.61 24.404,21.61 v4@24.765,21.971 ; U7.12 v4@40.894,34.417
  Bottom Layer w0.5: v4(24.257,21.971) 28.321,21.971 v4@40.767,34.417
  other v4: 40.64,34.417
MULT4: R14.2 U7.1 | length 18.7
  Top Layer w0.5: R14.2 23.495,26.924 24.511,25.908 26.289,25.908 26.924,26.543 35.166,26.543 U7.1
MULT5: R29.2 U7.5 | length 15
  Top Layer w0.5: R29.2 40.607,25.24 40.894,25.527 U7.5
MULT6: R44.2 U7.2 | length 19.4
  Top Layer w0.5: R44.2 29.558,39.784 31.496,37.846 31.496,30.861 33.528,28.829 36.703,28.829 37.084,28.448 U7.2
MULT7: R59.2 U7.4 | length 30.2
  Top Layer w0.5: R59.2 21.466,39.784 22.683,41.001 28.305,41.001 28.872,40.434 30.528,40.434 32.639,38.323 32.639,31.623 34.783,29.479 38.212,29.479 39.624,28.067 U7.4
MULT8: R15.2 U9.13 | length 29.7
  Top Layer w0.5: R15.2 24.003,43.942 26.035,41.91 v4@29.972,41.91 ; U9.13 47.625,41.275 v4(48.26,40.64)
  Bottom Layer w0.5: v4(30.48,41.91) 46.99,41.91 v4(48.26,40.64)
MULT9: R30.2 U9.14 | length 24.6
  Top Layer w0.5: R30.2 v4@29.29,44.624 ; U9.14 46.99,42.545 v4(48.26,43.815)
  Bottom Layer w0.5: v4(29.718,44.323) 47.752,44.323 v4(48.26,43.815)
MULT10: R45.2 U9.15 | length 30.2
  Top Layer w0.5: R45.2 27.7,57.578 29.036,57.578 32.258,54.356 32.258,49.911 34.671,47.498 41.275,47.498 42.672,46.101 46.609,46.101 46.99,45.72 46.99,44.45 46.355,43.815 U9.15
MULT11: R60.2 U9.12 | length 37
  Top Layer w0.5: R60.2 25.494,57.564 26.797,56.261 28.755,56.261 31.335,53.68 31.335,49.31 34.036,46.609 40.767,46.609 43.307,44.069 43.307,40.64 43.942,40.005 U9.12
MULTIP_A: U1.15 | length 2.4
  Top Layer w0.3: 55.476,12.994 U1.15
  Top Layer w0.35: 55.476,12.994 v1(56.485,11.985)
MULTIP_B: U1.14 | length 2.4
  Top Layer w0.3: 54.976,12.635 U1.14
  Top Layer w0.35: v1(54.199,11.858) 54.976,12.635
MULTP_EN: U1.13 | length 2.6
  Top Layer w0.35: 53.264,12.747 U1.13
  Top Layer w0.5: v1(52.421,12.747) 53.264,12.747
NetC1_2: C1.2 U1.5 Z1.1 | length 14.1
  Top Layer w0.35: C1.2@41.021,20.447 43.093,20.447 Z1.1 43.474,18.756 44.069,18.161 47.498,18.161 48.096,18.759 U1.5
NetC2_2: C2.2 U1.3 Z2.1 | length 7.8
  Top Layer w0.35: C2.2 51.308,24.765 50.927,24.384 Z2.1 50.927,20.701 51.869,19.759 U1.3
NetC3_2: C3.2 U1.6 Z1.3 | length 16.5
  Top Layer w0.35: C3.2 41.021,13.843 42.799,15.621 45.974,15.621 ; Z1.3 45.974,15.621 ; U1.6 48.612,18.259 45.974,15.621
NetC4_2: C4.2 U1.4 Z2.2 | length 11.4
  Top Layer w0.3: Z2.2 47.727,20.98 49.448,19.259 U1.4
  Top Layer w0.5: C4.2 45.974,22.479 46.267,22.186 Z2.2
NetC13_2: C13.2 L2.2 U1.9
NetC24_2: C24.2 U8.3 | length 2.9
  Top Layer w0.5: C24.2 35.881,74.616 36.422,75.157 U8.3
NetD2_1: D2.1 L3.2 U8.1 | length 24.9
  Top Layer w0.5: D2.1@36.422,71.22 35.533,71.22 32.993,73.76 32.993,77.697 34.136,78.84 38.975,78.84 ; U8.1 38.975,78.84 ; L3.2@47.09,78.156 46.406,78.84 38.975,78.84
NetH1_1: H1.1 U1.26 | length 74.8
  Top Layer w0.3: U1.26 62.524,15.759
  Top Layer w0.35: 62.524,15.759 63.068,15.215
  Top Layer w0.5: 63.068,15.215 63.068,13.36 v1(64.745,11.684) ; v1@77.074,13.211 78.849,14.986 83.676,14.986 86.777,18.087 86.777,47.475 84.5,49.752 84.5,53.35 84.9,53.75 91,53.75 91.456,53.294 H1.1
  Bottom Layer w0.5: v1(64.745,11.684) 75.047,11.684 v1(76.574,13.211)
NetH1_2: H1.2 R6.1 | length 2
  Top Layer w0.5: R6.1 H1.2
NetH2_1: H2.1 U1.25 | length 78.6
  Top Layer w0.35: v1@61.276,12.147 U1.25
  Top Layer w0.5: v1@61.276,12.147 v1(61.311,12.112) ; v1(74.966,15.243) 75.979,16.256 83.49,16.256 85.761,18.527 85.761,46.864 ; 85.775,46.85 85.761,46.864 ; H2.1 91.456,58.685 90.943,58.172 87.433,58.172 82.725,53.464 82.725,49.9 85.761,46.864
  Bottom Layer w0.5: v1@61.717,12.112 v1(61.311,12.112) 62.28,13.081 67.259,13.081 69.291,15.113 v1@74.966,15.113
NetH2_2: H2.2 R7.2 | length 2
  Top Layer w0.5: R7.2@89.457,56.807 H2.2
NetL3_1: L3.1 R71.2 R73.2 U8.7 | length 13.3
  Top Layer w0.5: U8.7 43.534,76.427 46.455,73.506 49.122,73.506 52.514,76.898 R71.2@53.276,76.898
NetR3_1: R3.1 R12.2 U6.2 | length 18.7
  Top Layer w0.35: U6.2 v2(21.336,41.91) v2@21.717,41.529
  Bottom Layer w0.35: R12.2 R3.1 14.732,40.386 20.574,40.386 v2@21.717,41.529
NetR3_2: R3.2 R15.1 U6.1 | length 24.5
  Top Layer w0.5: U6.1 R15.1 17.907,41.783 17.907,39.37 18.796,38.481 21.082,38.481 22.352,39.751 v2(24.003,39.751)
  Bottom Layer w0.35: R3.2 22.098,39.116 22.733,39.751 v2(24.003,39.751)
NetR4_1: R4.1 R10.2 U4.2 | length 18.1
  Top Layer w0.5: v2(14.605,9.271) 15.367,8.509 21.082,8.509 21.336,8.763 U4.2
  Bottom Layer w0.5: R10.2 R4.1 14.605,12.573 v2(14.605,9.271)
NetR4_2: R4.2 R13.1 U4.1 | length 8.7
  Top Layer w0.5: v2(17.78,10.414) 18.428,9.766 R13.1 U4.1
  Bottom Layer w0.5: R4.2 16.637,13.716 17.78,12.573 v2@17.78,10.668
NetR9_1: R9.1 R11.2 U5.2 | length 28.9
  Top Layer w0.5: U5.2 21.336,28.829 20.701,28.194 16.764,28.194 16.002,27.432 16.002,26.162 16.891,25.273 21.463,25.273 v2(22.479,24.257)
  Bottom Layer w0.5: R11.2 R9.1 13.589,23.876 14.986,25.273 21.717,25.273 v2@22.733,24.257
NetR9_2: R9.2 R14.1 U5.1 | length 17.3
  Top Layer w0.5: v2(19.177,23.749) 15.113,23.749 14.478,24.384 14.478,27.432 16.67,29.624 R14.1 19.578,29.624 U5.1
  Bottom Layer w0.5: R9.2 v2@18.796,23.876
NetR16_2: R16.2 R19.2 U4.3 | length 15
  Top Layer w0.35: R19.2 16.764,12.446 17.915,13.597 22.344,13.597 22.606,13.335 U4.3
  Top Layer w0.5: R16.2 10.574,13.843 R19.2
NetR17_2: R17.2 R20.2 U5.3 | length 16.7
  Top Layer w0.35: 14.859,29.431 17.051,31.623 22.606,31.623 U5.3
  Top Layer w0.5: R17.2 10.574,27.94 R20.2 14.859,29.431
NetR18_2: R18.2 R21.2 U6.3 | length 19.7
  Top Layer w0.35: R18.2 10.574,41.402 R21.2 13.081,40.005 13.843,40.767 13.843,43.561 19.685,49.403 22.225,49.403 22.606,49.022 U6.3
NetR22_1: R22.1 R27.2 U6.6 | length 25.9
  Top Layer w0.5: v2(25.654,45.212) 26.416,45.974 U6.6
  Bottom Layer w0.5: R27.2 R22.1 14.732,42.926 17.653,42.926 19.558,44.831 19.558,47.752 20.447,48.641 25.273,48.641 25.654,48.26 v2(25.654,45.212)
NetR22_2: R22.2 R30.1 U6.7 | length 21.7
  Top Layer w0.5: R30.1 U6.7 v2@30.086,47.892
  Bottom Layer w0.5: R22.2 18.923,41.656 21.209,43.942 24.003,43.942 24.384,43.561 26.289,43.561 30.099,47.371 v2(30.099,47.879)
NetR23_1: R23.1 R25.2 U4.6 | length 20.9
  Top Layer w0.5: v3(25.273,9.271) 26.416,10.414 U4.6
  Bottom Layer w0.5: R25.2 R23.1 14.732,14.986 19.812,14.986 25.273,9.525 v3(25.273,9.271)
NetR23_2: R23.2 R28.1 U4.7 | length 19.2
  Top Layer w0.5: R28.1 U4.7 ; U4.7@27.813,11.811 v2(29.591,11.811)
  Bottom Layer w0.5: R23.2 24.892,16.256 29.337,11.811 v2(29.591,11.811)
NetR24_1: R24.1 R26.2 U5.6 | length 27.7
  Top Layer w0.5: U5.6 26.416,31.75 26.797,32.131 28.702,32.131 29.591,31.242 v2(29.591,30.099)
  Bottom Layer w0.5: R26.2 R24.1 13.589,26.543 13.589,27.178 16.51,30.099 v2(29.591,30.099) v2@29.845,30.099
NetR24_2: R24.2 R29.1 U5.7 | length 14.3
  Top Layer w0.5: v2(25.527,27.559) 27.305,27.559 R29.1 U5.7
  Bottom Layer w0.5: R24.2 24.384,26.416 v2(25.527,27.559)
NetR31_2: R31.2 R34.2 U4.5 | length 18.3
  Top Layer w0.35: R31.2 10.574,17.399 R34.2 13.876,14.097 24.765,14.097 25.146,13.716 U4.5
NetR32_2: R32.2 R35.2 U5.5 | length 18
  Top Layer w0.35: R32.2 10.541,31.656 R35.2 14.224,30.226 16.256,32.258 24.384,32.258 25.146,31.496 U5.5
NetR33_2: R33.2 R36.2 U6.5 | length 19.9
  Top Layer w0.35: R33.2 10.574,44.704 R36.2 12.446,43.307 19.05,49.911 24.765,49.911 25.146,49.53 U6.5
NetR37_1: R37.1 R42.2 U6.9 | length 26.5
  Top Layer w0.5: v2(25.4,55.626) 26.416,54.61 U6.9
  Bottom Layer w0.5: R42.2 R37.1 14.732,45.466 17.018,45.466 17.526,45.974 17.526,49.784 18.669,50.927 22.987,50.927 25.4,53.34 v2(25.4,55.626)
NetR37_2: R37.2 R45.1 U6.8 | length 24
  Top Layer w0.5: U6.8 R45.1 ; U6.8@27.699,52.705 v2(29.718,52.705)
  Bottom Layer w0.5: R37.2 17.399,44.196 18.415,45.212 18.415,49.149 19.304,50.038 27.813,50.038 29.718,51.943 v2(29.718,52.705)
NetR38_1: R38.1 R40.2 U4.9 | length 25.9
  Top Layer w0.5: U4.9 26.416,15.113 27.051,14.478 v2(29.591,14.478)
  Bottom Layer w0.5: R40.2 R38.1 14.605,17.653 26.416,17.653 v2(29.591,14.478)
NetR38_2: R38.2 R43.1 U4.8 | length 15
  Top Layer w0.5: v2(25.654,20.193) 26.937,18.91 R43.1 U4.8
  Bottom Layer w0.5: R38.2 24.638,18.796 v2@25.908,20.066
NetR39_1: R39.1 R41.2 U5.9 | length 21
  Top Layer w0.5: v2(25.781,38.1) 26.416,37.465 U5.9
  Bottom Layer w0.5: R41.2 R39.1 14.732,35.306 16.923,35.306 17.304,34.925 23.114,34.925 v2@26.162,37.973
NetR39_2: R39.2 R44.1 U5.8 | length 18.1
  Top Layer w0.5: R44.1 U5.8 v2@29.705,34.912
  Bottom Layer w0.5: R39.2 28.829,34.036 v2(29.718,34.925)
NetR46_2: R46.2 R49.2 U4.10 | length 19.3
  Top Layer w0.35: R46.2 10.574,20.955 R49.2 16.924,14.605 24.384,14.605 25.146,15.367 U4.10
NetR47_2: R47.2 R50.2 U5.10 | length 17
  Top Layer w0.35: R47.2 10.574,34.925 R50.2 15.748,33.528 16.383,32.893 24.13,32.893 25.146,33.909 U5.10
NetR48_2: R48.2 R51.2 U6.10 | length 19.4
  Top Layer w0.35: R51.2 10.574,47.99 R48.2 16.383,48.26 18.669,50.546 24.257,50.546 25.146,51.435 U6.10
NetR52_1: R52.1 R57.2 U6.13 | length 20
  Top Layer w0.5: U6.13 21.336,54.356 21.844,54.864 v2(21.844,54.991)
  Bottom Layer w0.5: R57.2 R52.1 13.462,51.435 15.494,53.467 20.447,53.467 21.844,54.864 v2(21.844,54.991)
NetR52_2: R52.2 R60.1 U6.14 | length 10.6
  Top Layer w0.5: v3(16.129,51.689) 17.132,52.692 U6.14 R60.1
  Bottom Layer w0.5: v3@16.129,50.8 16.162,50.767 R52.2
NetR53_1: R53.1 R55.2 U4.13 | length 17.2
  Top Layer w0.5: U4.13 21.336,19.812 v2(22.352,20.828)
  Bottom Layer w0.5: R55.2 R53.1 13.462,21.209 14.605,20.066 21.59,20.066 22.225,20.701 v2@22.352,20.701
NetR53_2: R53.2 R58.1 U4.14 | length 8.6
  Top Layer w0.5: v2@18.034,21.971 v2(18.034,21.717) 18.034,19.939 19.063,18.91 R58.1 U4.14
  Bottom Layer w0.5: R53.2 17.526,21.336 v2@17.907,21.717
NetR54_1: R54.1 R56.2 U5.13 | length 16.5
  Top Layer w0.5: U5.13 21.336,36.449 v2(22.733,37.846)
  Bottom Layer w0.5: R56.2 R54.1 13.564,36.576 14.834,37.846 17.145,37.846 17.526,38.227 21.336,38.227 21.717,37.846 v2(22.733,37.846)
NetR54_2: R54.2 R59.1 U5.14 | length 6.3
  Top Layer w0.5: v2(18.161,36.576) 18.669,37.084 R59.1 U5.14
  Bottom Layer w0.5: R54.2 v2(18.161,36.576)
NetR61_2: R61.2 R64.2 U4.12 | length 18.6
  Top Layer w0.35: R64.2 13.589,21.496 13.589,19.812 18.161,15.24 22.352,15.24 22.606,15.494 U4.12
  Top Layer w0.5: R61.2 10.574,24.511 R64.2
NetR62_2: R62.2 R65.2 U5.12 | length 15.6
  Top Layer w0.35: R65.2 13.716,36.703 17.018,33.401 22.352,33.401 22.606,33.655 U5.12
  Top Layer w0.5: R62.2 10.574,38.1 R65.2
NetR63_2: R63.2 R66.2 U6.12 | length 14.9
  Top Layer w0.35: R66.2 17.018,49.911 18.161,51.054 22.225,51.054 22.606,51.435 U6.12
  Top Layer w0.5: R63.2 10.574,51.308 R66.2
NetR73_1: R73.1 U8.8 | length 2.7
  Top Layer w0.5: U8.8 R73.1@45.366,77.697
NetR74_1: R74.1 R75.2 U8.5 | length 5.1
  Top Layer w0.5: R74.1 41.916,71.126 R75.2 42.632,72.698 U8.5
NetU2_4: U2.4 X3.3 | length 13.9
  Top Layer w0.35: U2.4 79.454,7.696 80.859,6.291 82.256,6.291
  Top Layer w0.5: 82.256,6.291 87.463,6.291 88.098,6.926 88.098,8.704 87.738,9.064 X3.3
NetU2_5: U2.5 X3.2 | length 8.1
  Top Layer w0.35: U2.5 v1(81.443,8.196)
  Top Layer w0.5: v1(81.443,8.196) 82.078,8.831 84.034,8.831 84.601,8.264 X3.2
POWER_CONTROL: U1.19 X8.1 | length 41
  Top Layer w0.35: U1.19 57.476,12.724 v1(58.1,12.1)
  Bottom Layer w0.5: 29.527,1.1 44.8,1.1 45.898,2.198 45.898,6.108 46.389,6.6 54.8,6.6 58.1,9.9 v1(58.1,12.1)
  Bottom Layer w1: X8.1 28.92,1.707 29.527,1.1
RST: R2.2 S2.2 U1.7 | length 33.9
  Top Layer w0.3: 49.89,17.759 U1.7
  Top Layer w0.35: 48.768,16.637 49.89,17.759
  Top Layer w0.5: v1(46.5,7.8) 47.166,7.8 51.68,3.286 57,3.286 ; v7(48.26,14.986) 48.26,16.129 48.768,16.637 48.768,16.632 ; R2.2 57,3.286 ; S2.2 59.314,3.286 57,3.286
  Bottom Layer w0.35: v1(46.5,7.8) 48.768,10.068 48.26,10.576 v7(48.26,14.986)
SPI_ADC1_CS: U1.42
SPI_ADC2_CS: U1.43
SPI_CLK: U1.39
SPI_MISO: U1.40
SPI_MOSI: U1.41
SWC: U1.37 X4.2 | length 19.5
  Top Layer w0.35: U1.37 59.976,24.112
  Top Layer w0.5: 59.976,24.112 61.235,25.371 v1(64.287,25.371)
  Bottom Layer w0.6: v1@64.262,25.197 68.783,20.676 74.689,20.676 X4.2@74.905,20.46
SWD: U1.34 X4.1 | length 16.2
  Top Layer w0.3: U1.34 63.93,19.759
  Top Layer w0.35: 63.93,19.759 64.516,20.345
  Top Layer w0.5: 64.516,20.345 v1(64.516,21.285)
  Bottom Layer w0.6: v1(64.516,21.285) 65.532,21.285 68.732,18.085 74.74,18.085 X4.1@74.905,17.92
UART_RX: U1.31 U2.26 | length 26.9
  Top Layer w0.3: U1.31 63.046,18.259
  Top Layer w0.35: 63.046,18.259 64.768,16.537 ; 76.775,3.48 U2.26
  Top Layer w0.5: 64.768,16.537 67.95,13.355 67.95,11.493 68.072,11.371 68.072,8.661 74.233,2.5 75.795,2.5 76.775,3.48
UART_TX: U1.30 U2.25 | length 27
  Top Layer w0.3: U1.30 62.454,17.759
  Top Layer w0.35: 62.454,17.759 64.516,15.697 ; 75.449,3.5 76.275,4.326 U2.25
  Top Layer w0.5: v1(64.516,14.427) 64.516,15.697 ; v1(67.539,15.748) 69.215,14.071 69.215,9.042 74.757,3.5 75.449,3.5
  Bottom Layer w0.5: v1(64.516,14.427) 66.218,14.427 v1(67.539,15.748)
pads on no net: L1.1 U1.2 U1.16 U1.17 U1.20 U1.21 U1.22 U1.27 U1.28 U1.29 U1.38 U1.45 U1.46 U2.1 U2.2 U2.7 U2.9 U2.10 U2.11 U2.12 U2.13 U2.14 U2.15 U2.16 U2.17 U2.18 U2.19 U2.20 U2.21 U2.22 U2.23 U2.24 U2.27 U2.28 U3.5 U3.8 U9.1 U9.2 U9.4 U9.5 X3. X3.1 X3.4 X7.3 X7.5 X7.7 X7.9 X7.10 X9.3 X9.5 X9.7 X9.9 X9.10 Z1.2 Z1.4 Z2.3 Z2.4
copper on no net: | length 602.3
  Top Layer w0.3: 54.964,65.251 54.964,66.394 ; 54.964,72.744 54.964,74.141
  Top Layer w0.5: 83.463,7.464 86.332,7.464 ; 93,3 90,0 3,0 0,3 0,60 3,63 90,63 93,60 93,16.104
  Bottom Layer w0.5: 90.013,0.013 90,0.013 ; 90,0.013 92.987,3 93,3 93,60 92,61 90,63 89.987,63.013 3.013,63.013 0,60 0,3 2.987,0.013 90,0.013

## Polygon pours and split planes (outlines as drawn)
GNDA on Bottom Layer "Top Layer-No Net" (solid, remove dead copper, shelved, pour order 16): 0,0 0,63 52,63 52,44 32,24 32,0
GND on Bottom Layer "Top Layer-No Net" (solid, remove dead copper, shelved, pour order 14): 92.657,-0.075 92.657,62.925 53.565,62.925 53.565,43.925 53.394,43.925 32.555,23.086 32.565,23.076 32.565,-0.075

## Other copper
Top Layer:
  text "20V" at 22.325,65.251 h1
  text "+12V" at 71.5,44 h1
  text "GND" at 72.5,41.5 h1
  text "CANH" at 71.5,39.5 h1
  text "L" at 74,37 h1
  text "GND" at 70.891,24.917 h1
  text "3.3" at 70.79,21.692 h1
  text "SWC" at 70.587,19.456 h1
  text "SWD" at 70.587,17.094 h1
  text "Boot" at 52,1 h1
  text "Rst" at 57,1 h1
Bottom Layer:
  text "BMS" at 38.588,60.365 h1
  text "Solar" at 46.588,60.365 h1
  text "ver 1.1" at 38.588,58.365 h1
  text "Driven" at 46.588,58.365 h1
  text "2017" at 38.588,56.365 h1
  text "Systems" at 46.588,56.365 h1

## Silkscreen, mask and mechanical layers (free items; w line width, h text height)
Mechanical 15:
  lines w0.254: -7.3,31.5 82.7,31.5
  lines w0.5: -20,6 100,6 ; -9.897,56.754 111.103,56.754 ; 20,-11.5 20,74 ; 45,-22 45,75 ; 70,-11.5 70,74

## Dimensions
3.013,63.013 to 2.987,0.013 on Top Overlay
0,60 to 93,60 on Top Overlay
24,60 to 66,60 on Top Overlay
24,3 to 66,3 on Top Overlay
66,60 to 66,3 on Top Overlay
66,60 to 59.944,60.198 on Mechanical 15
44.16,3 to 66,3 on Mechanical 15
24,60 to 66,60 on Mechanical 1
24,60 to 24,3 on Mechanical 1
0,3 to 92.987,3 on Mechanical 1
89.987,63.013 to 90,0.013 on Mechanical 1